# Altium PCB ucus_kayit.PcbDoc
Units mm, origin at the board's own origin, x right, y up, seen from the top; angles counter-clockwise.
Board outline 50 x 50 mm, 2 copper layers (Top Layer, Bottom Layer), stack 1.571 mm thick; 34 components, 21 nets, 164 pads, 36 vias.
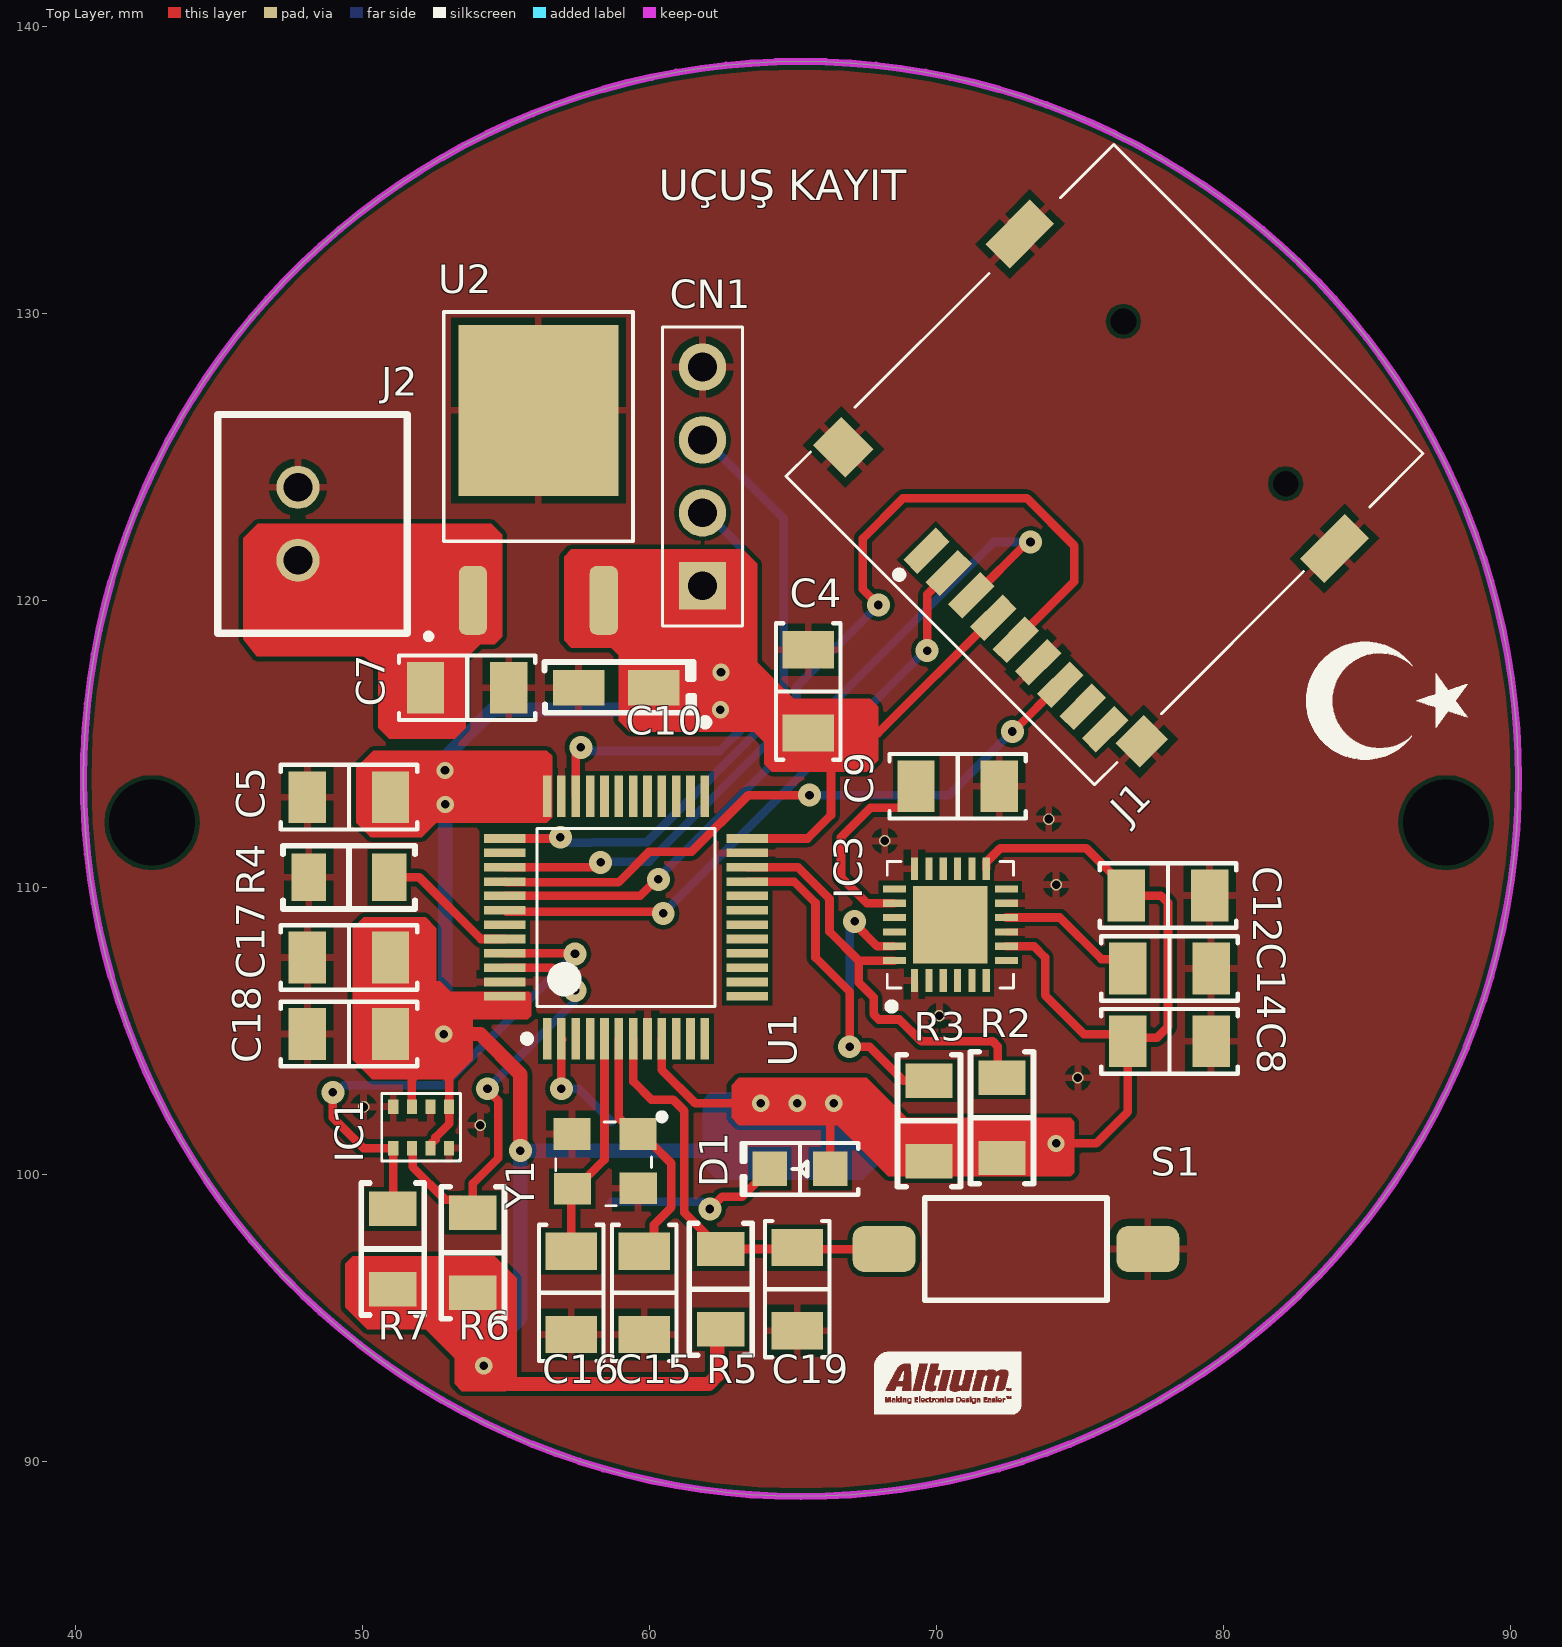
[diagram p0: Top Layer view]
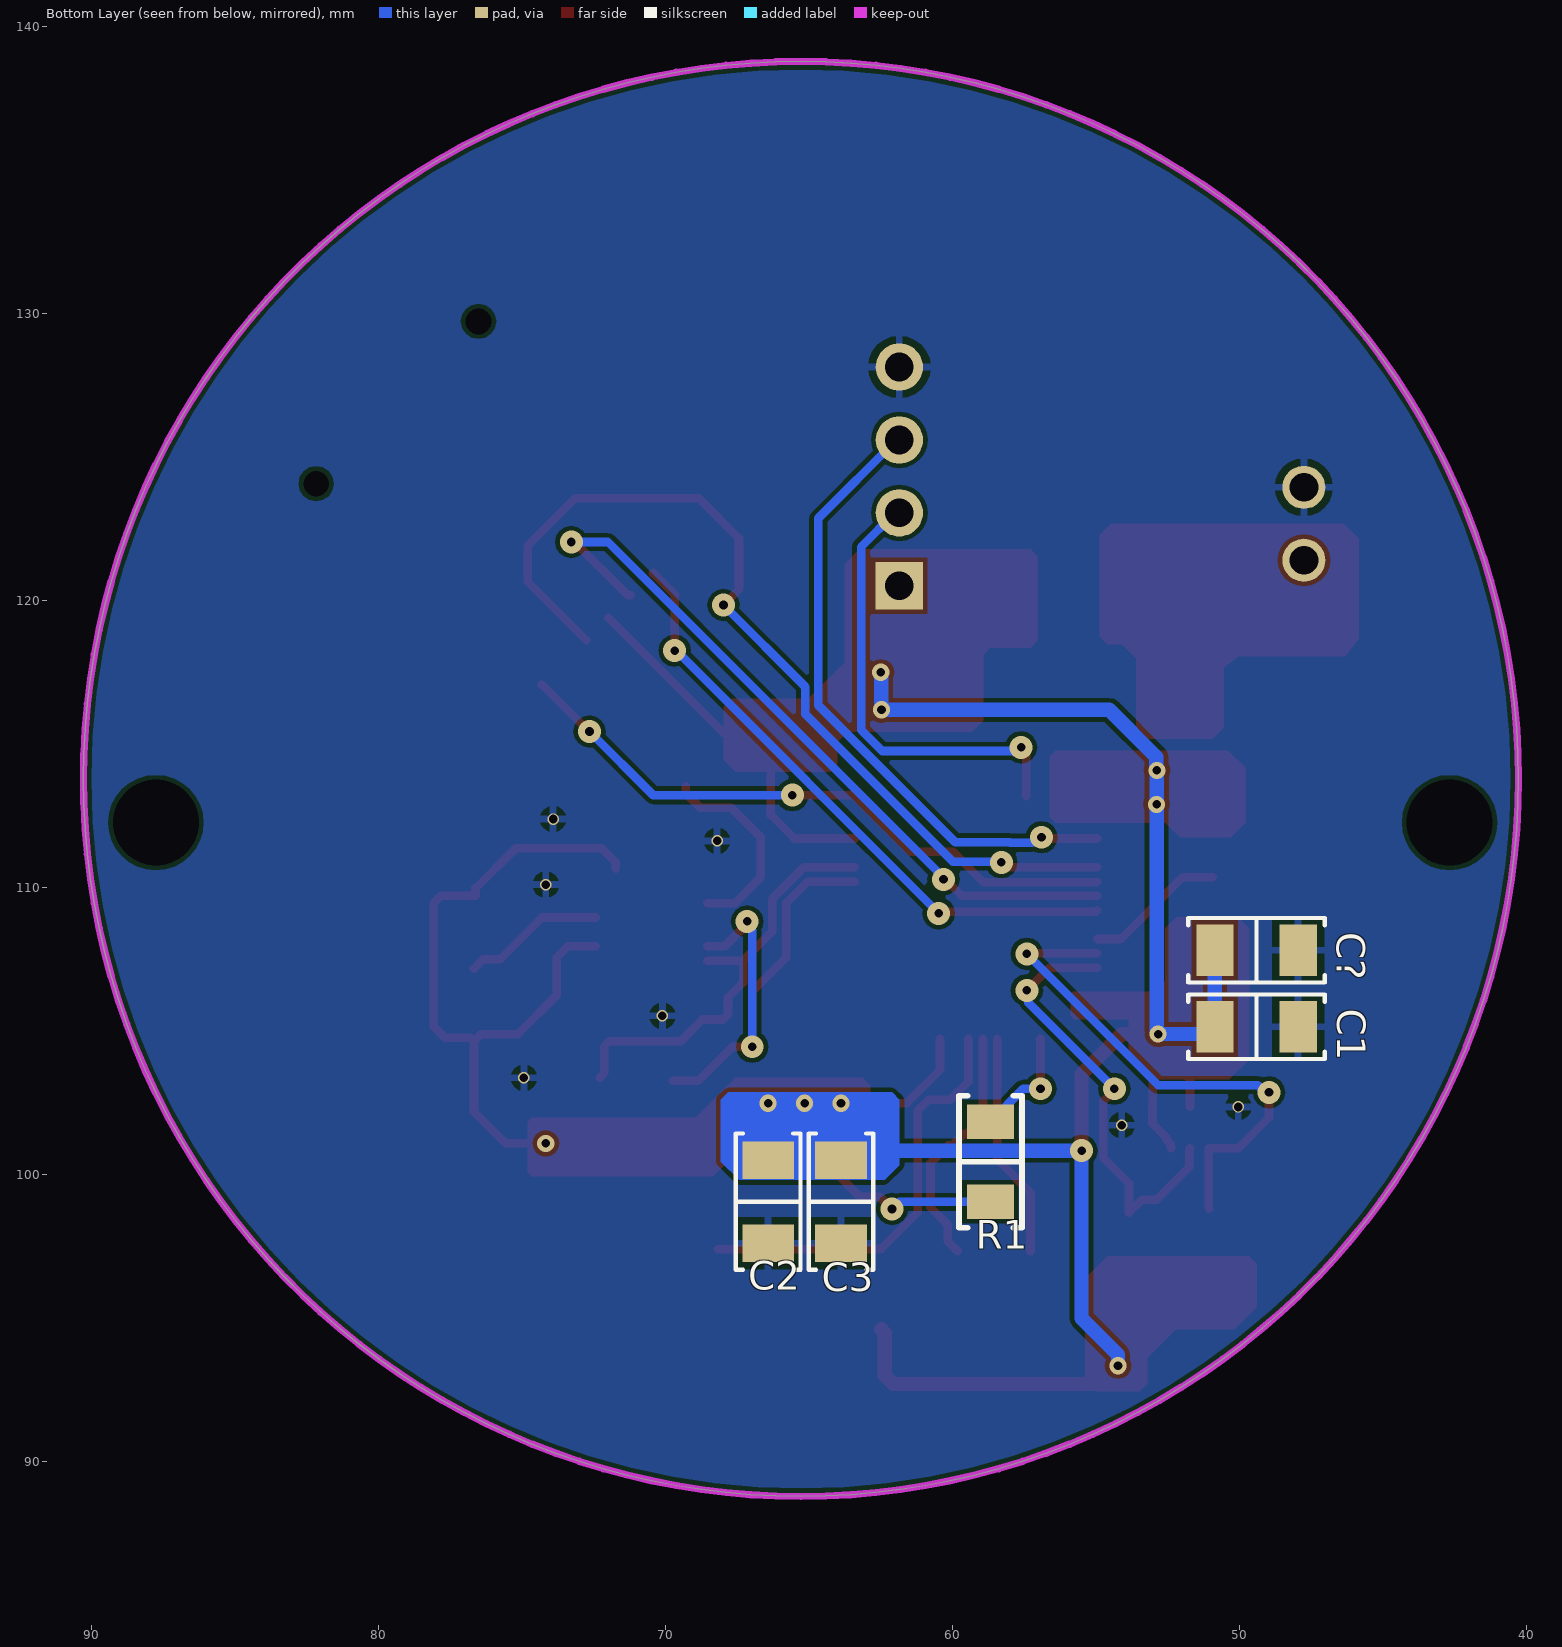
[diagram p1: Bottom Layer view, seen from below]
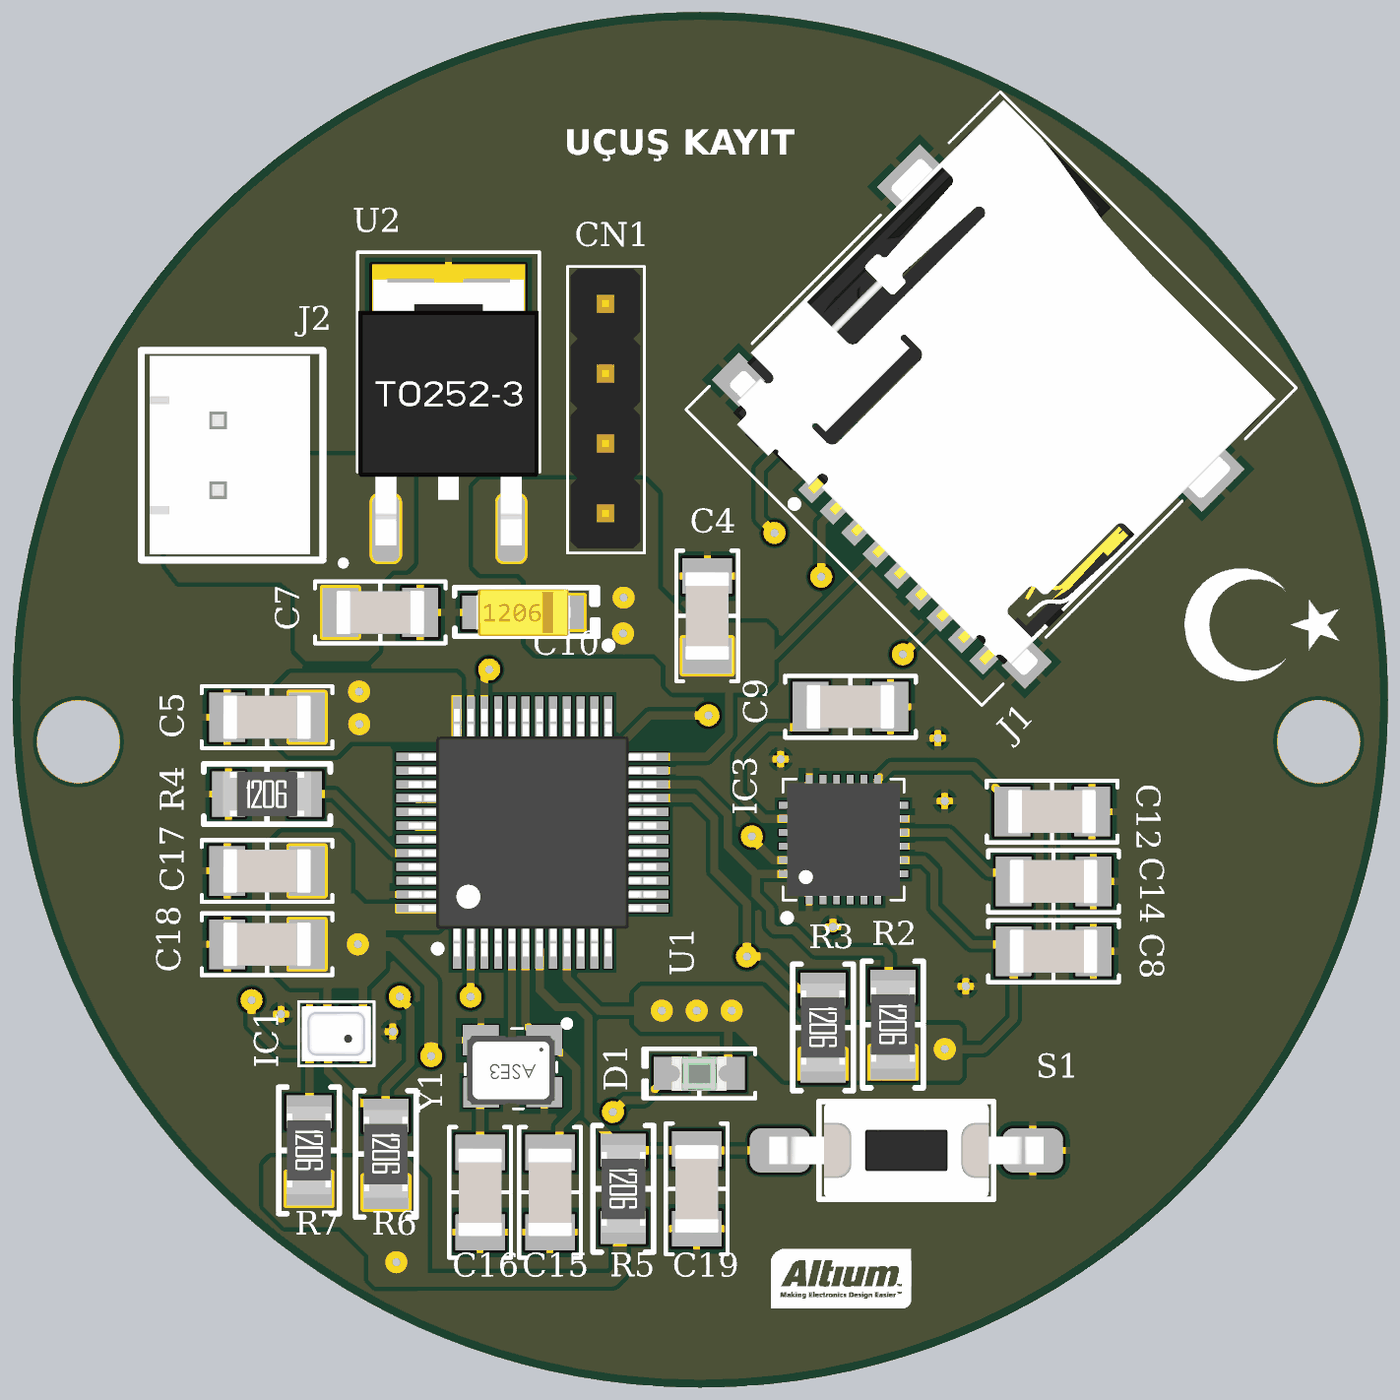
[diagram p2: 3D render of the assembled board from above, using the file's embedded part models]
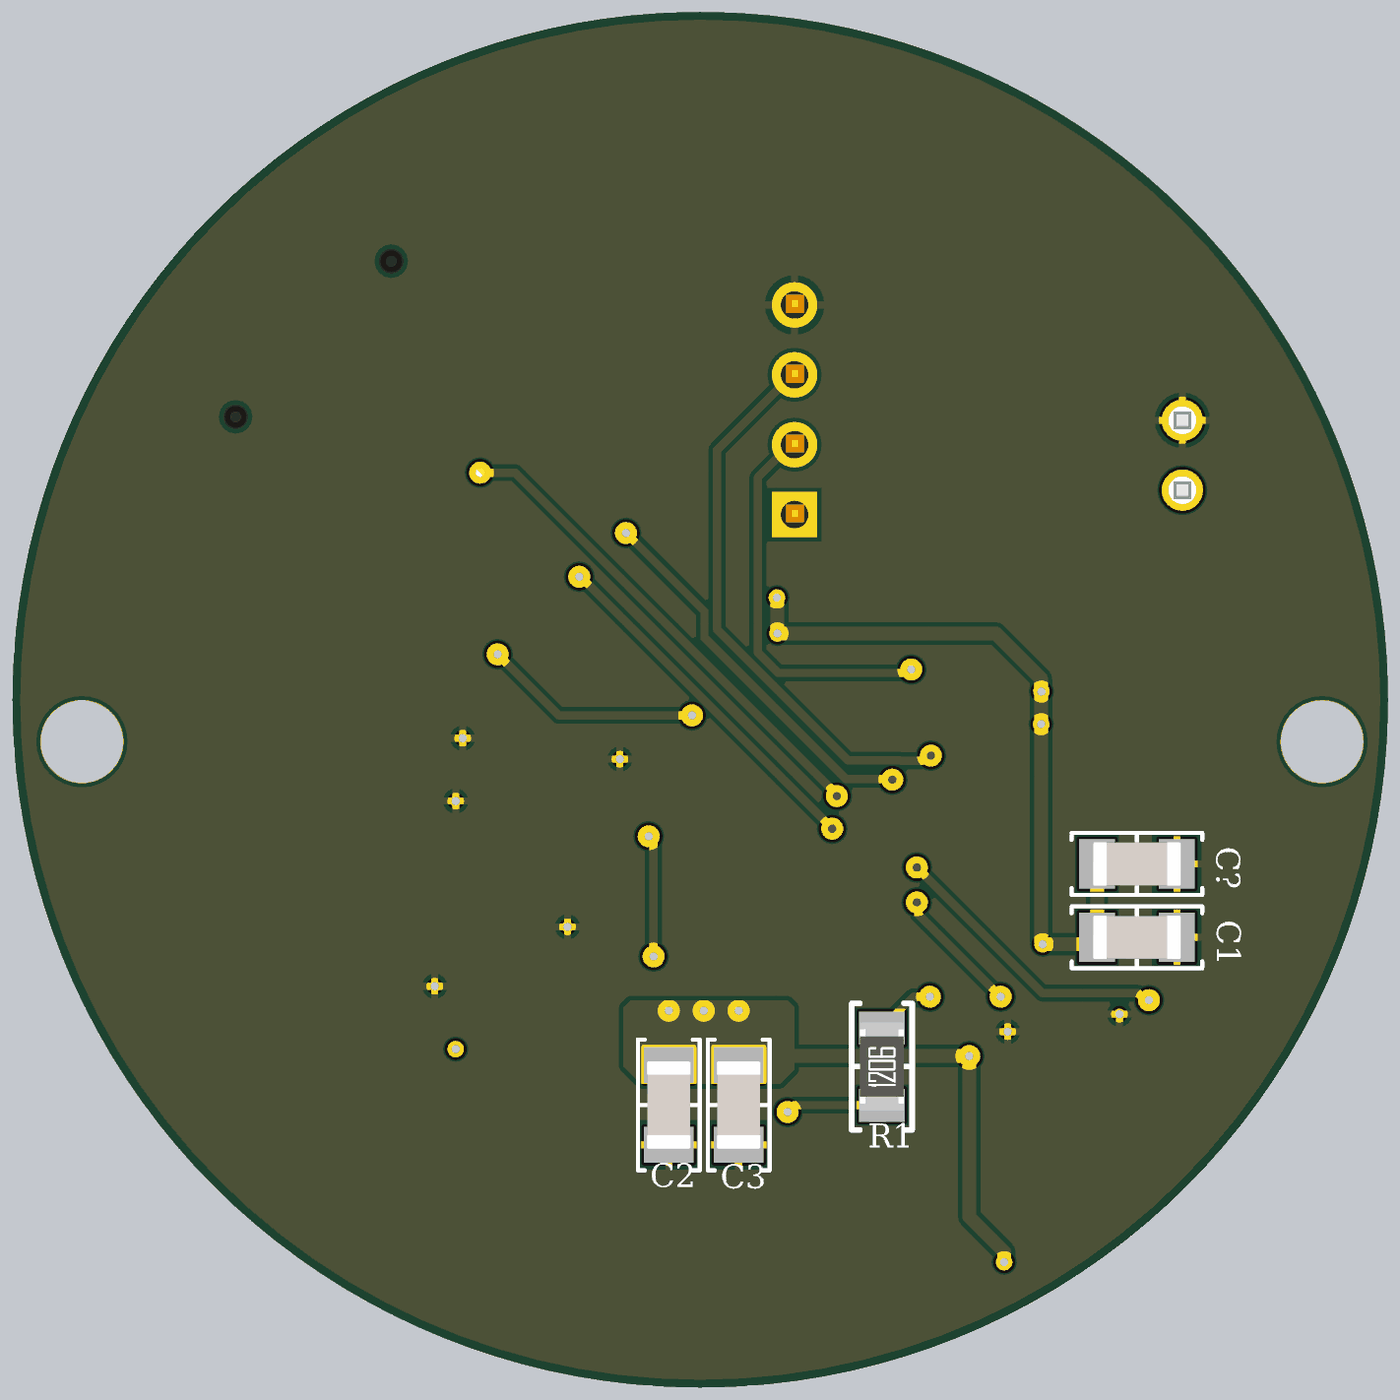
[diagram p3: 3D render of the assembled board from below, using the file's embedded part models]

## Layer stack, top to bottom
Top Solder: solder mask 0.0102, Solder Resist, Dk 3.5
Top Layer: signal copper 0.0356
Dielectric 1: dielectric 1.5, FR-4, Dk 4.8
Bottom Layer: signal copper 0.0356
Bottom Solder: solder mask 0.0102, Solder Resist, Dk 3.5

## Board outline
65.278,88.792 cw(c65.278,113.792) 40.278,113.792 cw(c65.278,113.792) 65.278,138.792 cw(c65.278,113.792) 90.278,113.792 cw(c65.278,113.792)

## Design rules (kind name [scope] priority, off if disabled: settings)
Clearance [All] p1: gap=0.152 ignorepadtopadclearanceinfootprint=FALSE
HoleSize [All] p1: absolutevalues=TRUE maxlimit=5 minlimit=0 maxpercent=80.000 minpercent=20.000
MinimumSolderMaskSliver [All] p1: minsoldermaskwidth=0.05
PolygonConnect [All] p1: connectstyle=Relief reliefconductorwidth=0.254 reliefentries=4 polygonreliefangle="90 Angle" airgapwidth=0.254
RoutingVias [All] p1: holewidth=0.75 width=0.8 viastyle="Through Hole" minholewidth=0.3 minwidth=0.5 maxholewidth=0.1 maxwidth=2
SilkToSilkClearance [All] p1: silktosilkclearance=0
SilkToSolderMaskClearance [IsPad] p1: minsilkscreentomaskgap=0 clearancetoexposedcopper=TRUE
SolderMaskExpansion [All] p1: expansion=0.102 istentingtop=FALSE
Width [All] p1: maxlimit=2 minlimit=0.152 preferedwidth=0.3 minimp=50.000000 maximp=50.000000 favimp=50.000000
26 further rules are at their usual default settings.

## Components (designator, comment, footprint, x,y, rotation, side; value= is the part's Value field where it differs from the comment)
C1 "0.1 µF" "CAP 1206_3216 - 0.8MM" 49.403,105.156 r0 bottom
C2 "10 nF" "CAP 1206_3216 - 0.8MM" 66.421,99.06 r90 bottom
C3 "1 µF" "CAP 1206_3216 - 0.8MM" 63.881,99.06 r90 bottom
C4 "0.1 µF" "CAP 1206_3216 - 0.8MM" 65.532,116.84 r270 top
C5 "0.1 µF" "CAP 1206_3216 - 0.8MM" 49.53,113.157 r0 top
C7 "0.33 µF" "CAP 1206_3216 - 0.8MM" 53.647,116.967 r180 top
C8 "10 nF" "CAP 1206_3216 - 0.8MM" 78.121,104.648 r180 top
C9 "2.2 nF" "CAP 1206_3216 - 0.8MM" 70.739,113.538 r0 top
C10 "10µF" "CAP POL 1206_3216" 58.841,116.967 r180 top
C12 "0.1 µF" "CAP 1206_3216 - 0.8MM" 78.068,109.728 r0 top
C14 "0.1 µF" "CAP 1206_3216 - 0.8MM" 78.121,107.188 r0 top
C15 "16 pF" "CAP 1206_3216 - 0.8MM" 59.817,95.885 r270 top
C16 "16 pF" "CAP 1206_3216 - 0.8MM" 57.277,95.885 r270 top
C17 "0.1 µF" "CAP 1206_3216 - 0.8MM" 49.53,107.569 r0 top
C18 "0.1 µF" "CAP 1206_3216 - 0.8MM" 49.53,104.902 r0 top
C19 "0.1 µF" "CAP 1206_3216 - 0.8MM" 65.151,96.012 r90 top
C? "4.7µF" "CAP 1206_3216 - 1.0MM" 49.403,107.823 r0 bottom
CN1 "CONN4 MALE 1" "CONN4 MALE 1" 64.389,124.333 r270 top
D1 "Green" "LED 0805_2012 GREEN" 65.244,100.203 r180 top
IC1 "BMP280" BMP280 52.197,101.6 r270 top
IC3 "MPU6050" QFN 70.485,108.712 r90 top
J1 "MIKRO SD CARD CONNECTOR" "MICRO SD CARD CONNECTOR" 75.772,125.151 r135 top
J2 "JST2" JST2 47.879,122.682 r90 top
R1 "330 Ohms" "RES 1206_3216" 58.674,100.454 r90 bottom
R2 "4.7 kOhms" "RES 1206_3216" 72.284,101.983 r270 top
R3 "4.7 kOhms" "RES 1206_3216" 69.741,101.877 r270 top
R4 "10 kOhms" "RES 1206_3216" 49.53,110.363 r0 top
R5 "10 kOhms" "RES 1206_3216" 62.484,96.012 r270 top
R6 "4.7 kOhms" "RES 1206_3216" 53.848,97.282 r270 top
R7 "4.7 kOhms" "RES 1206_3216" 51.054,97.409 r270 top
S1 "SWITCH" "TE FSMSMTR" 70.612,97.409 r0 top
U1 "STM32F103 2" LQFP48 59.182,108.966 r90 top
U2 "LD29150DT33R" TO252-3 56.128,126.635 r0 top
Y1 "OSCILLATOR" OSCILLATOR 58.42,100.33 r180 top

## Footprints (in the part's own frame and the unit in brackets; to place one, negate y for a bottom-side part, rotate by r counter-clockwise, add the part's x,y. Pads: shape width x height; smd on the part's side, far side on the other; paste and mask are expansions set on the pad)
BMP280 [mm]
  rect 0.5x0.35 smd: 1(0.675,0.825) 2(0.675,0.175) 3(0.675,-0.475) 4(0.675,-1.125) 5(-0.775,-1.125) 5(-0.775,-1.125) 6(-0.775,-0.475) 7(-0.775,0.175) 8(-0.775,0.825)
  silkscreen extent -1.22,-1.53 1.12,1.22, body extent -1.05,-1.4 0.95,1.1, height 0.95
"CAP 1206_3216 - 0.8MM" [mm] "Chip Capacitor, 2-Leads, Body 3.25x1.60mm, IPC Medium Density"
  rect 1.3x1.8 smd: 1(-1.45,0) 2(1.45,0)
  silkscreen extent -2.37,-1.12 2.37,1.12, body extent -1.6,-0.8 1.6,0.8, height 0.8
"CAP 1206_3216 - 1.0MM" [mm] "Chip Capacitor, 2-Leads, Body 3.25x1.60mm, IPC Medium Density"
  rect 1.3x1.8 smd: 1(-1.45,0) 2(1.45,0)
  silkscreen extent -2.37,-1.12 2.37,1.12, body extent -1.6,-0.8 1.6,0.8, height 1
"CAP POL 1206_3216" [mm] "Molded Capacitor, 2-Leads, Body 3.20x1.6mm, IPC Medium Density"
  rect 1.8x1.23 smd: 1(-1.31,0) 2(1.31,0)
  silkscreen extent -3.22,-0.9 2.5,1.32, body extent -1.72,-0.85 1.71,0.85, height 1.7
"CONN4 MALE 1" [mm] "4 PIN 2.54MM"
  rect 1.65x1.65 hole 1 mask+0: 1(3.81,-2.54)
  round 1.65 hole 1 mask+0: 2(1.27,-2.54) 3(-1.27,-2.54) 4(-3.81,-2.54)
  silkscreen extent -5.21,-3.94 5.21,-1.14, body extent -5.13,-3.83 5.03,-1.29, height 8.89
JST2 [mm] "2 PIN 2.54MM"
  round 1.5 hole 1 mask+0.102: 1(-1.27,0.127) 2(1.27,0.127)
  silkscreen extent -3.81,-3.68 3.81,2.92, body extent -3.61,-3.23 3.61,2.62, height 7.21
"LED 0805_2012 GREEN" [mm] "Chip Diode, 2-Leads, Body 2.00x1.25mm, IPC Medium Density"
  rect 1.2x1.2 smd: 1(-1.05,0) 2(1.05,0)
  silkscreen extent -2.03,-0.9 2.03,0.9, body extent -1,-0.62 1,0.63, height 0.9
LQFP48 [mm] "TSQFP, 48-Leads, Body 7,00x7,00mm, Pitch 0,50mm, IPC Medium Density"
  rect 1.45x0.3 smd mask+0.05: 1(-4.225,2.75) 2(-4.225,2.25) 3(-4.225,1.75) 4(-4.225,1.25) 5(-4.225,0.75) 6(-4.225,0.25) 7(-4.225,-0.25) 8(-4.225,-0.75) 9(-4.225,-1.25) 10(-4.225,-1.75) 11(-4.225,-2.25) 12(-4.225,-2.75) 25(4.225,-2.75) 26(4.225,-2.25) 27(4.225,-1.75) 28(4.225,-1.25) 29(4.225,-0.75) 30(4.225,-0.25) 31(4.225,0.25) 32(4.225,0.75) 33(4.225,1.25) 34(4.225,1.75) 35(4.225,2.25) 36(4.225,2.75)
  rect 0.3x1.45 smd mask+0.05: 13(-2.75,-4.225) 14(-2.25,-4.225) 15(-1.75,-4.225) 16(-1.25,-4.225) 17(-0.75,-4.225) 18(-0.25,-4.225) 19(0.25,-4.225) 20(0.75,-4.225) 21(1.25,-4.225) 22(1.75,-4.225) 23(2.25,-4.225) 24(2.75,-4.225) 37(2.75,4.225) 38(2.25,4.225) 39(1.75,4.225) 40(1.25,4.225) 41(0.75,4.225) 42(0.25,4.225) 43(-0.25,4.225) 44(-0.75,4.225) 45(-1.25,4.225) 46(-1.75,4.225) 47(-2.25,4.225) 48(-2.75,4.225)
  silkscreen extent -4.35,-3.1 3.1,3.57, body extent -4.5,-4.5 4.5,4.5, height 1.6
"MICRO SD CARD CONNECTOR" [mm]
  rect 0.7x1.6 smd paste+0 mask+0: 1(1.918,6.735) 2(0.818,6.735) 3(-0.282,6.735) 4(-1.382,6.735) 5(-2.482,6.735) 6(-3.582,6.735) 7(-4.682,6.735) 8(-5.782,6.735) Cd(-6.882,6.735)
  rect 1.2x1.4 smd paste+0 mask+0: 10(-8.082,6.135)
  rect 1.6x1.4 smd paste+0 mask+0: 11(6.518,6.235)
  rect 1.2x2.2 smd paste+0 mask+0: 12(-8.082,-3.365) 13(7.418,-3.365)
  round 0 hole 0.9 unplated paste-1000 mask+0: ""(-5.282,-3.765) ""(2.718,-3.765)
  silkscreen extent -7.99,-7.89 7.31,8.36, body extent -8.33,-7.76 7.67,7.49, height 1.85
OSCILLATOR [mm] "8MHZ 12.5pF"
  rect 1.3x1.1 smd mask+0.05: 1(-1.181,-1.09) 2(1.119,-1.09) 3(1.103,0.817) 4(-1.186,0.801)
  silkscreen extent -2.11,-1.79 1.68,1.41, body extent -1.58,-1.24 1.62,1.26, height 1.22
QFN [mm] "QFN, 24-Leads, Body 4,00x4,00mm, Pitch 0,50mm, Thermal Pad 2,70x2,60mm, IPC Medium Density"
  rect 0.8x0.25 smd mask+0.05: 1(-1.95,1.25) 2(-1.95,0.75) 3(-1.95,0.25) 4(-1.95,-0.25) 5(-1.95,-0.75) 6(-1.95,-1.25) 13(1.95,-1.25) 14(1.95,-0.75) 15(1.95,-0.25) 16(1.95,0.25) 17(1.95,0.75) 18(1.95,1.25)
  rect 0.25x0.8 smd mask+0.05: 7(-1.25,-1.95) 8(-0.75,-1.95) 9(-0.25,-1.95) 10(0.25,-1.95) 11(0.75,-1.95) 12(1.25,-1.95) 19(1.25,1.95) 20(0.75,1.95) 21(0.25,1.95) 22(-0.25,1.95) 23(-0.75,1.95) 24(-1.25,1.95)
  rect 2.7x2.6 smd mask+0.05: 25(0,0)
  silkscreen extent -2.97,-2.2 2.2,2.2, body extent -2.07,-2.07 2.07,2.07, height 0.95
"RES 1206_3216" [mm] "Chip Resistor, 2-Leads, Body 3.13x1.55mm, IPC Medium Density"
  rect 1.2x1.65 smd: 1(-1.4,0) 2(1.4,0)
  silkscreen extent -2.3,-1.1 2.3,1.1, body extent -1.6,-0.8 1.6,0.8, height 0.6
"TE FSMSMTR" [mm]
  rrect50% 2.19x1.6 smd: 1(-2.436,0) 2(6.754,0)
  silkscreen extent -1.02,-1.78 5.33,1.78, body extent -2.83,-1.75 7.14,1.75, height 4.42
TO252-3 [mm]
  rrect50% 0.98x2.4 smd: 1(-2.28,-6.62) 2(2.28,-6.62)
  rect 5.57x5.96 smd paste-4: 3(0,0)
  silkscreen extent -3.92,-7.97 3.3,3.43, body extent -3.27,-7.24 3.27,2.43, height 2.29

## Part data
C1 C4 C5 C12 C14 C17 C18 C19: library part 1206B104M500CT, "CAP CER 0.1UF 50V X7R 1206", Device Package="1206 (3216 Metric)", manufacturer="Walsin Technology Corporation", Operating Temperature="-55°C ~ 125°C", Supplier Part Number 1=1292-1606-1-ND, Temperature Coefficient=X7R, Tolerance=±20%, Voltage - Rated=50V, Applications="General Purpose", Capacitance="0.1 µF", componentlink1description=Datasheet, componentlink1url=http://www.passivecomponent.com/wp-content/uploads/2018/10/MLCC.pdf, componentlink2description="DigiKey Link", componentlink2url=https://www.digikey.com/en/products/detail/walsin-technology-corporation/1206B104M500CT/9355103, lastupdated="2.04.2022 06:00:47", Lifecycle Status=Active, Minimum Order=1, Mounting Type="Surface Mount, MLCC", Package / Case="1206 (3216 Metric)", packaging=TapeAndReel, Part Number=1206B104M500CT, Part Status=Active, partid=41385, price=0.02, series=-, Size / Dimension="0.126\" L x 0.063\" W (3.20mm x 1.60mm)", Supplier 1=DigiKey, Thickness (Max)="0.035\" (0.90mm)"
C2 C8: library part C1206C103F3GECAUTO, "CAP CER 1206 10NF 25V C0G 1%", Capacitance="10000 pF", Device Package="1206 (3216 Metric)", manufacturer=KEMET, Operating Temperature="-55°C ~ 125°C", Ratings=AEC-Q200, Supplier Part Number 1=399-C1206C103F3GECAUTOCT-ND, Temperature Coefficient="C0G, NP0", Tolerance=±1%, Voltage - Rated=25V, Applications="Automotive, ESD Protection", componentlink1description=Datasheet, componentlink1url=https://api.kemet.com/component-edge/download/datasheet/C1206C103F3GECAUTO.pdf, componentlink2description="DigiKey Link", componentlink2url=https://www.digikey.com/en/products/detail/kemet/C1206C103F3GECAUTO/8647500, Features="Low ESL", lastupdated="3.01.2023 20:12:33", Lifecycle Status=Active, Minimum Order=1, Mounting Type="Surface Mount, MLCC", Package / Case="1206 (3216 Metric)", packaging=TapeAndReel, Part Number=C1206C103F3GECAUTO, Part Status=Active, partid=30341, price=0.67, series="ESD SMD Auto C0G", Size / Dimension="0.126\" L x 0.063\" W (3.20mm x 1.60mm)", Supplier 1=DigiKey, Thickness (Max)="0.039\" (1.00mm)"
C3: library part C1206X105K3RAC3316, "CAP CER 1206 1UF 25V X7R", Device Package="1206 (3216 Metric)", manufacturer=KEMET, Operating Temperature="-55°C ~ 125°C", Ratings=AEC-Q200, Supplier Part Number 1=399-C1206X105K3RAC3316CT-ND, Temperature Coefficient=X7R, Tolerance=±10%, Voltage - Rated=25V, Applications="Automotive, Boardflex Sensitive", Capacitance="1 µF", componentlink1description=Datasheet, componentlink1url=https://api.kemet.com/component-edge/download/datasheet/C1206X105K3RAC3316.pdf, componentlink2description="DigiKey Link", componentlink2url=https://www.digikey.com/en/products/detail/kemet/C1206X105K3RAC3316/10315781, Features="Soft Termination", lastupdated="2.04.2022 06:00:41", Lifecycle Status=Active, Minimum Order=1, Mounting Type="Surface Mount, MLCC", Package / Case="1206 (3216 Metric)", packaging=TapeAndReel, Part Number=C1206X105K3RAC3316, Part Status=Active, partid=19010, price=0.32, series="SMD Auto X7R VW80808", Size / Dimension="0.130\" L x 0.063\" W (3.30mm x 1.60mm)", Supplier 1=DigiKey, Thickness (Max)="0.047\" (1.20mm)"
C7: library part C1206X334K3RAC7800, "CAP CER 0.33UF 25V X7R 1206", Device Package="1206 (3216 Metric)", manufacturer=KEMET, Operating Temperature="-55°C ~ 125°C", Supplier Part Number 1=399-20222-1-ND, Temperature Coefficient=X7R, Tolerance=±10%, Voltage - Rated=25V, Applications="Boardflex Sensitive", Capacitance="0.33 µF", componentlink1description=Datasheet, componentlink1url=https://api.kemet.com/component-edge/download/datasheet/C1206X334K3RAC7800.pdf, componentlink2description="DigiKey Link", componentlink2url=https://www.digikey.com/en/products/detail/kemet/C1206X334K3RAC7800/6097286, Features="Soft Termination", lastupdated="3.01.2023 20:13:14", Lifecycle Status=Active, Minimum Order=1, Mounting Type="Surface Mount, MLCC", Package / Case="1206 (3216 Metric)", packaging=TapeAndReel, Part Number=C1206X334K3RAC7800, Part Status=Active, partid=18929, price=0.20, series="SMD Comm X7R Flex", Size / Dimension="0.130\" L x 0.063\" W (3.30mm x 1.60mm)", Supplier 1=DigiKey, Thickness (Max)="0.039\" (0.98mm)"
C9: library part C1206C222K5GEC7210, "CAP CER 1206 2.2NF 50V C0G 10%", Capacitance="2200 pF", Device Package="1206 (3216 Metric)", manufacturer=KEMET, Operating Temperature="-55°C ~ 125°C", Supplier Part Number 1=399-C1206C222K5GEC7210CT-ND, Temperature Coefficient="C0G, NP0", Tolerance=±10%, Voltage - Rated=50V, Applications="ESD Protection", componentlink1description=Datasheet, componentlink1url=https://api.kemet.com/component-edge/download/datasheet/C1206C222K5GEC7210.pdf, componentlink2description="DigiKey Link", componentlink2url=https://www.digikey.com/en/products/detail/kemet/C1206C222K5GEC7210/8646303, Features="Low ESL", lastupdated="3.01.2023 20:12:29", Lifecycle Status=Active, Minimum Order=1, Mounting Type="Surface Mount, MLCC", Package / Case="1206 (3216 Metric)", packaging=TapeAndReel, Part Number=C1206C222K5GEC7210, Part Status=Active, partid=30052, price=0.04, series="ESD SMD Comm C0G", Size / Dimension="0.126\" L x 0.063\" W (3.20mm x 1.60mm)", Supplier 1=DigiKey, Thickness (Max)="0.047\" (1.20mm)"
C10: library part F951E106MAAAQ2, "CAP TANT 10UF 20% 25V 1206", Device Package="1206 (3216 Metric)", ESR (Equivalent Series Resistance)=2Ohm, manufacturer="AVX Corporation", Manufacturer Size Code=A, Operating Temperature="-55°C ~ 125°C", Supplier Part Number 1=478-8496-1-ND, Tolerance=±20%, Voltage - Rated=25V, Capacitance=10µF, componentlink1description=Datasheet, componentlink1url=http://datasheets.avx.com/F95.pdf, componentlink2description="DigiKey Link", componentlink2url=http://digikey.com/product-detail/en/avx-corporation/F951E106MAAAQ2/478-8496-1-ND/4005728, Features="General Purpose", Height - Seated (Max)="0.063\" (1.60mm)", lastupdated="2.09.2020 01:15:59", Lifecycle Status=Active, Minimum Order=1, Mounting Type="Surface Mount", Package / Case="1206 (3216 Metric)", packaging=TapeAndReel, Part Number=F951E106MAAAQ2, Part Status=Active, partid=173, price=0.28, series="F95, Frameless™", Size / Dimension="0.126\" L x 0.067\" W (3.20mm x 1.70mm)", Supplier 1=DigiKey, Type="Conformal Coated"
C15 C16: library part C1206C160J5GAC7800, "CAP CER 16PF 50V NP0 1206", Device Package="1206 (3216 Metric)", manufacturer=KEMET, Operating Temperature="-55°C ~ 125°C", Supplier Part Number 1=399-17465-1-ND, Temperature Coefficient="C0G, NP0", Tolerance=±5%, Voltage - Rated=50V, Applications="General Purpose", Capacitance="16 pF", componentlink1description=Datasheet, componentlink1url=https://api.kemet.com/component-edge/download/datasheet/C1206C160J5GACTU.pdf, componentlink2description="DigiKey Link", componentlink2url=https://www.digikey.com/en/products/detail/kemet/C1206C160J5GAC7800/2215316, Features="Low ESL", lastupdated="2.04.2022 06:00:48", Lifecycle Status=Active, Minimum Order=1, Mounting Type="Surface Mount, MLCC", Package / Case="1206 (3216 Metric)", packaging=TapeAndReel, Part Number=C1206C160J5GAC7800, Part Status=Active, partid=40774, price=0.08, series="SMD Comm C0G", Size / Dimension="0.126\" L x 0.063\" W (3.20mm x 1.60mm)", Supplier 1=DigiKey, Thickness (Max)="0.035\" (0.88mm)"
C?: library part 1206ZD475JAT2A, "CAP CER 4.7UF 10V X5R 1206", Device Package="1206 (3216 Metric)", manufacturer="AVX Corporation", Operating Temperature="-55°C ~ 85°C", Supplier Part Number 1=478-12253-1-ND, Temperature Coefficient=X5R, Tolerance=±5%, Voltage - Rated=10V, Applications="General Purpose", Capacitance=4.7µF, componentlink1description=Datasheet, componentlink1url=http://datasheets.avx.com/cx5r.pdf, componentlink2description="DigiKey Link", componentlink2url=http://digikey.com/product-detail/en/avx-corporation/1206ZD475JAT2A/478-12253-1-ND/9565660, lastupdated="2.09.2020 01:04:58", Lifecycle Status=Active, Minimum Order=1, Mounting Type="Surface Mount, MLCC", Package / Case="1206 (3216 Metric)", packaging=TapeAndReel, Part Number=1206ZD475JAT2A, Part Status=Active, partid=20565, price=0.46, series=-, Size / Dimension="0.126\" L x 0.063\" W (3.20mm x 1.60mm)", Supplier 1=DigiKey, Thickness (Max)="0.037\" (0.94mm)"
CN1: "4 PIN 2.54MM"
D1: library part 5975316507F, "LED GREEN 0805 SMD", Current - Test=20mA, Device Package="0805 (2012 Metric)", Lens Color=0.93mm, manufacturer=Dialight, Millicandela Rating=16mcd, Supplier Device Package=0805, Supplier Part Number 1=350-4389-1-ND, Voltage - Forward (Vf) (Typ)=2.2V, Color=Green, componentlink1description=Datasheet, componentlink1url=http://www.dialightsignalsandcomponents.com/Assets/Drawings/2D_Drawings_DrawingDetailedSpec/NewDrawings/18370A.pdf, componentlink2description="DigiKey Link", componentlink2url=https://www.digikey.com/en/products/detail/dialight/5975316507F/9385444, Configuration=Standard, Height (Max)=0.93mm, lastupdated="2.04.2022 06:37:24", Lens Size="1.40mm x 1.24mm", Lens Style="Rectangle with Flat Top", Lifecycle Status=Active, Minimum Order=1, Mounting Type="Surface Mount", Package / Case="0805 (2012 Metric)", packaging=TapeAndReel, Part Number=5975316507F, Part Status=Active, partid=245, price=0.13, series=597, Size / Dimension="2.00mm L x 1.25mm W", Supplier 1=DigiKey, Wavelength - Dominant=560nm
IC3: "IC-6050 SENSOR MOTION QFN24"
J2: "2 PIN 2.54MM"
R1: library part RC1206JR-07330RL, "RES 330 OHM 5% 1/4W 1206", Device Package="1206 (3216 Metric)", manufacturer=Yageo, Operating Temperature="-55°C ~ 155°C", Power (Watts)="0.25W, 1/4W", Supplier Device Package=1206, Supplier Part Number 1=311-330ERCT-ND, Temperature Coefficient=±100ppm/°C, Tolerance=±5%, componentlink1description=Datasheet, componentlink1url=https://www.yageo.com/upload/media/product/productsearch/datasheet/rchip/PYu-RC_Group_51_RoHS_L_10.pdf, componentlink2description="DigiKey Link", componentlink2url=https://www.digikey.com/en/products/detail/yageo/RC1206JR-07330RL/729279, Composition="Thick Film", Features="Moisture Resistant", Height - Seated (Max)="0.026\" (0.65mm)", lastupdated="2.01.2023 20:37:30", Lifecycle Status=Active, Minimum Order=1, Number of Terminations=2, Package / Case="1206 (3216 Metric)", packaging=TapeAndReel, Part Number=RC1206JR-07330RL, Part Status=Active, partid=27876, price=0.01, Resistance="330 Ohms", series=RC_L, Size / Dimension="0.122\" L x 0.063\" W (3.10mm x 1.60mm)", Supplier 1=DigiKey
R2 R3 R6 R7: library part TNPW12064K70BEEA, "RES 4.7K OHM 0.1% 2/5W 1206", Device Package="1206 (3216 Metric)", manufacturer="Vishay Dale", Operating Temperature="-55°C ~ 155°C", Power (Watts)="0.4W, 2/5W", Ratings=AEC-Q200, Supplier Device Package=1206, Supplier Part Number 1=541-3881-1-ND, Temperature Coefficient=±25ppm/°C, Tolerance=±0.1%, componentlink1description=Datasheet, componentlink1url=http://www.vishay.com/docs/28758/tnpw_e3.pdf, componentlink2description="DigiKey Link", componentlink2url=https://www.digikey.com/en/products/detail/vishay-dale/TNPW12064K70BEEA/1607929, Composition="Thin Film", Features="Anti-Sulfur, Automotive AEC-Q200, Moisture Resistant", Height - Seated (Max)="0.026\" (0.65mm)", lastupdated="2.04.2022 06:19:59", Lifecycle Status=Active, Minimum Order=1, Number of Terminations=2, Package / Case="1206 (3216 Metric)", packaging=TapeAndReel, Part Number=TNPW12064K70BEEA, Part Status=Active, partid=35087, price=0.20, Resistance="4.7 kOhms", series="TNPW e3", Size / Dimension="0.126\" L x 0.063\" W (3.20mm x 1.60mm)", Supplier 1=DigiKey
R4 R5: library part CRCW120610K0FKTA, "RES SMD 10K OHM 1% 1/4W 1206", Device Package="1206 (3216 Metric)", manufacturer="Vishay Dale", Operating Temperature="-55°C ~ 155°C", Power (Watts)="0.25W, 1/4W", Ratings=AEC-Q200, Supplier Device Package=1206, Supplier Part Number 1=541-CRCW120610K0FKTACT-ND, Temperature Coefficient=±100ppm/°C, Tolerance=±1%, componentlink1description=Datasheet, componentlink1url=http://www.vishay.com/docs/20008/dcrcw.pdf, componentlink2description="DigiKey Link", componentlink2url=http://digikey.com/product-detail/en/vishay-dale/CRCW120610K0FKTA/541-CRCW120610K0FKTACT-ND/11500860, Composition="Thick Film", Features="Automotive AEC-Q200", lastupdated="2.04.2022 06:19:13", Lifecycle Status=Active, Minimum Order=1, Number of Terminations=2, Package / Case="1206 (3216 Metric)", packaging=TapeAndReel, Part Number=CRCW120610K0FKTA, partid=57020, price=0.02, Resistance="10 kOhms", series=CRCW, Supplier 1=DigiKey
S1: library part "TACT SWITCH", "SMD 2 Pin Switch", componentlink1description=Datasheet, componentlink1url=https://www.te.com/commerce/DocumentDelivery/DDEController?Action=srchrtrv&DocNm=1437566-3&DocType=Customer+Drawing&DocLang=English
U2: "3V3"
Y1: "8MHZ 12.5pF"

## Free pads (board coordinates)
  round 0 hole 3: 3(42.672,112.268) 3(87.757,112.268)

## Via types
v1: diameter 0.8, hole 0.3, Top Layer to Bottom Layer, 19 vias
v2: diameter 0.6, hole 0.3, Top Layer to Bottom Layer, 10 vias
v3: diameter 0.4, hole 0.3, Top Layer to Bottom Layer, 7 vias

## Nets (pads, with @x,y where several pads share a name; then routed paths per layer and width w, separated by ;. In a path a pad name is that pad's centre, name@x,y a point inside that pad or via, vN(x,y) a via of type N, cw(c..) or ccw(c..) an arc to the next point about the centre after c; other vN are vias at no path point)
+3V3: C1.2 C2.2 C3.2 C4.2 C5.2 C8.2 C10.1 C12.1 C17.2 C18.2 C?.2 CN1.1 D1.1 IC1.2 IC1.6 IC1.8 IC3.8 IC3.13 J1.4 R2.2 R3.2 R5.2 R6.2 R7.2 U1.9 U1.24 U1.36 U1.48 U2.2 | length 117
  Top Layer w0.3: IC1.6 51.722,103.323 51.898,103.499 52.846,103.499 ; IC1.2 52.397,100.95 52.397,101.082 52.545,101.23 52.545,101.3 53.028,101.783 53.028,102.369 IC1.8 53.022,103.323 52.846,103.499 ; v2(52.832,104.902) 52.832,103.513 52.846,103.499 ; U1.9 60.432,103.654 61.597,102.489 v2(63.881,102.489) v2(65.151,102.489) v2(66.421,102.489) 66.421,102.408 66.294,102.281 D1.1 ; U1.24 65.505,111.716 66.324,112.535 66.324,114.598 66.282,114.64 66.282,114.89 C4.2@65.782,115.39 ; C4.2 C4.2@65.782,115.39 ; R3.2@69.516,100.477 R3.2 R3.2@69.744,100.474 ; IC3.13 71.735,110.887 72.227,111.379 75.217,111.379 76.618,109.978 C12.1 77.814,109.728 78.068,109.474 78.068,105.156 77.687,104.775 C8.2@76.794,104.775 ; J1.4 67.965,115.39 C4.2@65.782,115.39 ; IC3.8 72.439,107.958 73.398,107.958 73.787,107.569 73.787,106.25 75.135,104.902 76.417,104.902 C8.2 76.671,102.198 75.565,101.092 v2(74.168,101.092)
  Top Layer w0.5: v2(52.832,104.902) 54.102,104.902 55.499,103.505 v1(55.499,100.838) ; v2(54.229,93.345) 54.864,92.71 62.064,92.71 62.357,93.003 62.357,94.485 R5.2 ; R2.2@72.263,100.832 73.623,100.832
  Bottom Layer w0.5: C?.2 C1.2 50.853,104.902 v2(52.832,104.902) 52.832,104.929 52.884,104.981 v2(52.884,112.905) 52.88,112.909 52.88,114.086 v2(52.875,114.09) 52.892,114.107 52.892,114.558 54.536,116.201 v2(62.471,116.201) 62.482,116.212 62.482,117.495 v2(62.493,117.506) ; v2(54.229,93.345) 54.229,93.726 55.499,94.996 v1(55.499,100.838) 62.23,100.838 v2(63.881,102.489)
CSB: J1.2 U1.42 | length 21.6
  Top Layer w0.3: U1.42 55.005,109.168 60.419,109.168 v1(60.481,109.106) ; v1(69.677,118.263) 69.677,120.218 70.426,120.968 J1.2
  Bottom Layer w0.3: v1(60.481,109.106) 60.481,109.121 69.623,118.263 v1(69.677,118.263)
GND: C1.1 C2.1 C3.1 C4.1 C5.1 C7.1 C8.1 C9.2 C10.2 C12.2 C14.2 C15.2 C16.2 C17.1 C18.1 C19.1 C?.1 CN1.4 IC1.1 IC1.5 IC1.7 IC3.1 IC3.9 IC3.11 IC3.18 J1.6 J1.10 J1.11 J1.12 J1.13 J2.2 R4.1 S1.2 U1.8 U1.23 U1.35 U1.47 U2.3 Y1.2 Y1.4
  other v3: 54.102,101.727 50.038,102.362 74.93,103.378 70.104,105.537 74.168,110.109 68.199,111.633 73.914,112.395
LED: R1.2 U1.2 | length 4
  Top Layer w0.3: v1(56.93,102.997) 56.93,104.685 56.959,104.714 U1.2
  Bottom Layer w0.3: v1(56.93,102.997) 57.531,102.997 R1.2
NetC9_1: C9.1 IC3.20 | length 7.1
  Top Layer w0.3: IC3.20 67.576,109.462 66.675,110.363 66.675,111.76 67.703,112.788 68.789,112.788 69.289,113.288 C9.1
NetC14_1: C14.1 IC3.10 | length 5
  Top Layer w0.3: IC3.10 74.299,108.962 75.747,107.514 76.345,107.514 C14.1
NetD1_2: D1.2 R1.1 | length 6.2
  Top Layer w0.3: v1(62.103,98.806) 62.532,99.235 63.226,99.235 D1.2
  Bottom Layer w0.3: R1.1 61.855,99.054 v1(62.103,98.806)
NetR4_2: R4.2 U1.44 | length 4.9
  Top Layer w0.3: R4.2 51.98,110.363 54.127,108.216 U1.44
NRST: C19.2 R5.1 S1.1 U1.7 | length 14.7
  Top Layer w0.3: U1.7 59.439,104.734 59.439,103.248 60.071,102.616 60.829,102.616 61.214,102.231 61.214,98.682 R5.1 65.101,97.412 65.104,97.409 S1.1
OSC_IN: C16.1 U1.5 Y1.3 | length 7.9
  Top Layer w0.3: C16.1 57.277,99.373 58.432,100.528 U1.5
OSC_OUT: C15.1 U1.6 Y1.1 | length 8.7
  Top Layer w0.3: U1.6 58.932,101.989 59.501,101.42 Y1.1 60.001,101.02 60.143,101.02 60.762,100.401 60.762,98.862 60.159,98.259 60.159,97.677 C15.1
SCK: J1.5 U1.39 | length 32.7
  Top Layer w0.3: U1.39 58.126,110.716 v1(58.297,110.887) ; v1(67.978,119.854) 67.437,120.395 67.437,122.174 68.834,123.571 73.152,123.571 74.803,121.92 74.803,120.673 J1.5
  Bottom Layer w0.3: v1(58.297,110.887) 58.321,110.911 59.984,110.911 65.125,116.052 65.125,117.001 v1(67.978,119.854)
SCL_1: IC1.4 R7.1 U1.45 | length 18.4
  Top Layer w0.3: v1(48.967,102.87) 48.967,101.99 50.033,100.925 IC1.4 51.072,98.827 R7.1 ; U1.45 57.384,107.716 v1(57.404,107.696)
  Bottom Layer w0.3: v1(48.967,102.87) 49.102,102.87 49.356,103.124 52.832,103.124 v1(57.404,107.696)
SCL_2: IC3.23 R3.1 U1.21 | length 17.7
  Top Layer w0.3: U1.21 65.037,110.216 65.786,109.467 65.786,107.569 66.974,106.381 v1(66.974,104.46) 67.667,104.46 68.849,103.277 R3.1 ; v1(67.152,108.827) 67.152,108.743 67.931,107.964 IC3.23 IC3.23
  Bottom Layer w0.3: v1(66.974,104.46) 66.974,108.514 67.152,108.691 v1(67.152,108.827)
SDA_1: IC1.3 R6.1 U1.46 | length 15.7
  Top Layer w0.3: IC1.3 51.747,100.9 51.747,100.272 52.887,99.132 53.398,99.132 R6.1 53.848,99.695 54.737,100.584 54.737,102.571 54.356,102.952 v1(54.356,102.997) ; U1.46 56.614,107.216 v1(57.404,106.426)
  Bottom Layer w0.3: v1(54.356,102.997) 57.357,105.998 57.357,106.379 v1(57.404,106.426)
SDA_2: IC3.24 R2.1 U1.22 | length 15.2
  Top Layer w0.3: U1.22 65.179,110.716 66.275,109.62 66.275,108.477 67.292,107.46 ; IC3.24 67.294,107.462 67.294,106.7 67.818,106.176 67.818,105.586 67.994,105.41 68.707,105.41 69.469,104.648 71.96,104.648 72.136,104.472 72.136,103.531 R2.1
SDI: J1.3 U1.41 | length 26.3
  Top Layer w0.3: U1.41 57.138,109.716 57.15,109.728 59.686,109.728 60.248,110.29 v1(60.311,110.29) ; J1.3 71.315,120.19 73.172,122.047 v1(73.279,122.047)
  Bottom Layer w0.3: v1(60.311,110.29) 60.311,110.354 72.005,122.047 v1(73.279,122.047)
SDO: J1.7 U1.40 | length 22.2
  Top Layer w0.3: U1.40 54.988,110.185 58.917,110.185 59.984,111.252 61.468,111.252 63.441,113.225 v1(65.577,113.225) ; v1(72.644,115.443) 72.664,115.443 74.3,117.079 J1.7
  Bottom Layer w0.3: v1(65.577,113.225) 70.426,113.225 v1(72.644,115.443)
SWCLK: CN1.3 U1.37 | length 22.3
  Top Layer w0.3: U1.37 56.852,111.716 v1(56.896,111.76)
  Bottom Layer w0.3: v1(56.896,111.76) 57.031,111.76 57.22,111.571 57.988,111.571 58.006,111.589 59.905,111.589 64.673,116.358 64.673,122.874 61.944,125.603 CN1.3
SWDIO: CN1.2 U1.34 | length 15.9
  Top Layer w0.3: U1.34 57.432,114.716 v1(57.608,114.892)
  Bottom Layer w0.3: v1(57.608,114.892) 57.743,114.892 57.869,114.766 62.442,114.766 63.183,115.507 63.183,121.87 61.99,123.063 CN1.2
VIN: C7.2 J2.1 U2.1
pads on no net: IC3.2 IC3.3 IC3.4 IC3.5 IC3.6 IC3.7 IC3.12 IC3.14 IC3.15 IC3.16 IC3.17 IC3.19 IC3.21 IC3.22 IC3.25 J1. J1.1 J1.8 J1.Cd U1.1 U1.3 U1.4 U1.10 U1.11 U1.12 U1.13 U1.14 U1.15 U1.16 U1.17 U1.18 U1.19 U1.20 U1.25 U1.26 U1.27 U1.28 U1.29 U1.30 U1.31 U1.32 U1.33 U1.38 U1.43

## Polygon pours and split planes (outlines as drawn)
GND on Top Layer "GND_L01_P002" (solid, remove dead copper, pour order 2): 40.259,138.811 40.259,88.773 90.297,88.773 90.297,138.811
GND on Bottom Layer "GND_L02_P001" (solid, remove dead copper, pour order 1): 40.259,138.938 40.259,88.9 90.297,88.9 90.297,138.938

## Keep-outs
Keep-Out Layer:
  circle w0.254: c65.278,113.792 r25

## Other copper
Top Layer:
  region net +3V3: 50.038,108.966 49.657,108.585 49.657,104.013 50.347,103.323 53.158,103.323 53.594,103.759 53.594,105.855 52.705,106.744 52.578,106.744 52.578,108.585 52.197,108.966
  region net +3V3: 52.324,105.664 52.324,103.759 52.451,103.632 53.467,103.632 53.848,104.013 53.848,105.41 55.753,105.41 55.88,105.537 55.88,106.299 55.81,106.369 52.394,106.369 52.324,106.299
  region: 48.514,101.6
  region net +3V3: 49.657,97.155 49.403,96.901 49.403,95.377 50.165,94.615 52.197,94.615 53.213,93.599 53.213,92.71 53.467,92.456 54.991,92.456 55.372,92.837 55.372,96.393 54.61,97.155
  region net +3V3: 63.119,103.378 62.865,103.124 62.865,101.981 63.119,101.727 66.548,101.727 68.326,99.949 74.676,99.949 74.803,100.076 74.803,101.854 74.676,101.981 68.961,101.981 68.072,102.87 67.564,103.378
  region net +3V3: 50.383,114.772 49.784,114.173 49.784,112.268 50.292,111.76 52.07,111.76 52.578,112.268 56.42,112.268 56.605,112.453 56.605,114.591 56.424,114.772
  region: 62.992,98.933
  region net +3V3: 57.277,121.793 57.023,121.539 57.023,118.618 57.277,118.364 58.674,118.364 58.928,118.11 58.928,115.824 59.309,115.443 63.627,115.443 64.008,115.062 64.008,114.3 64.262,114.046 67.564,114.046 67.965,114.447 67.965,116.312 67.691,116.586 65.024,116.586 63.754,117.856 63.754,121.285 63.246,121.793
  region net VIN: 46.355,122.682 45.847,122.174 45.847,118.666 46.313,118.06 50.025,118.06 50.546,117.662 50.546,115.57 50.927,115.189 53.213,115.189 53.594,115.57 53.594,117.983 54.102,118.491 54.61,118.491 54.864,118.745 54.864,122.301 54.483,122.682
  region: 50.165,85.651
Bottom Layer:
  region net +3V3: 62.103,102.87 61.849,102.616 61.849,100.33 62.362,99.817 67.432,99.817 68.072,100.457 68.072,102.616 67.818,102.87

## Silkscreen, mask and mechanical layers (free items; w line width, h text height)
Top Overlay:
  drawing of 13 lines, arcs and shapes, not listed
  text "UÇUŞ KAYIT" at 60.325,133.613 h1.8